# Altium PCB tmp235_Front_End_Siognal_Chain.PcbDoc
Units mil, origin at the board's own origin, x right, y up, seen from the top; angles counter-clockwise.
Board outline 2560 x 1190 mil, 5 copper layers (Top Layer, GND, 3V3, 5V, Bottom Layer), stack 24.902 mil thick; 26 components, 27 nets, 116 pads, 66 vias.
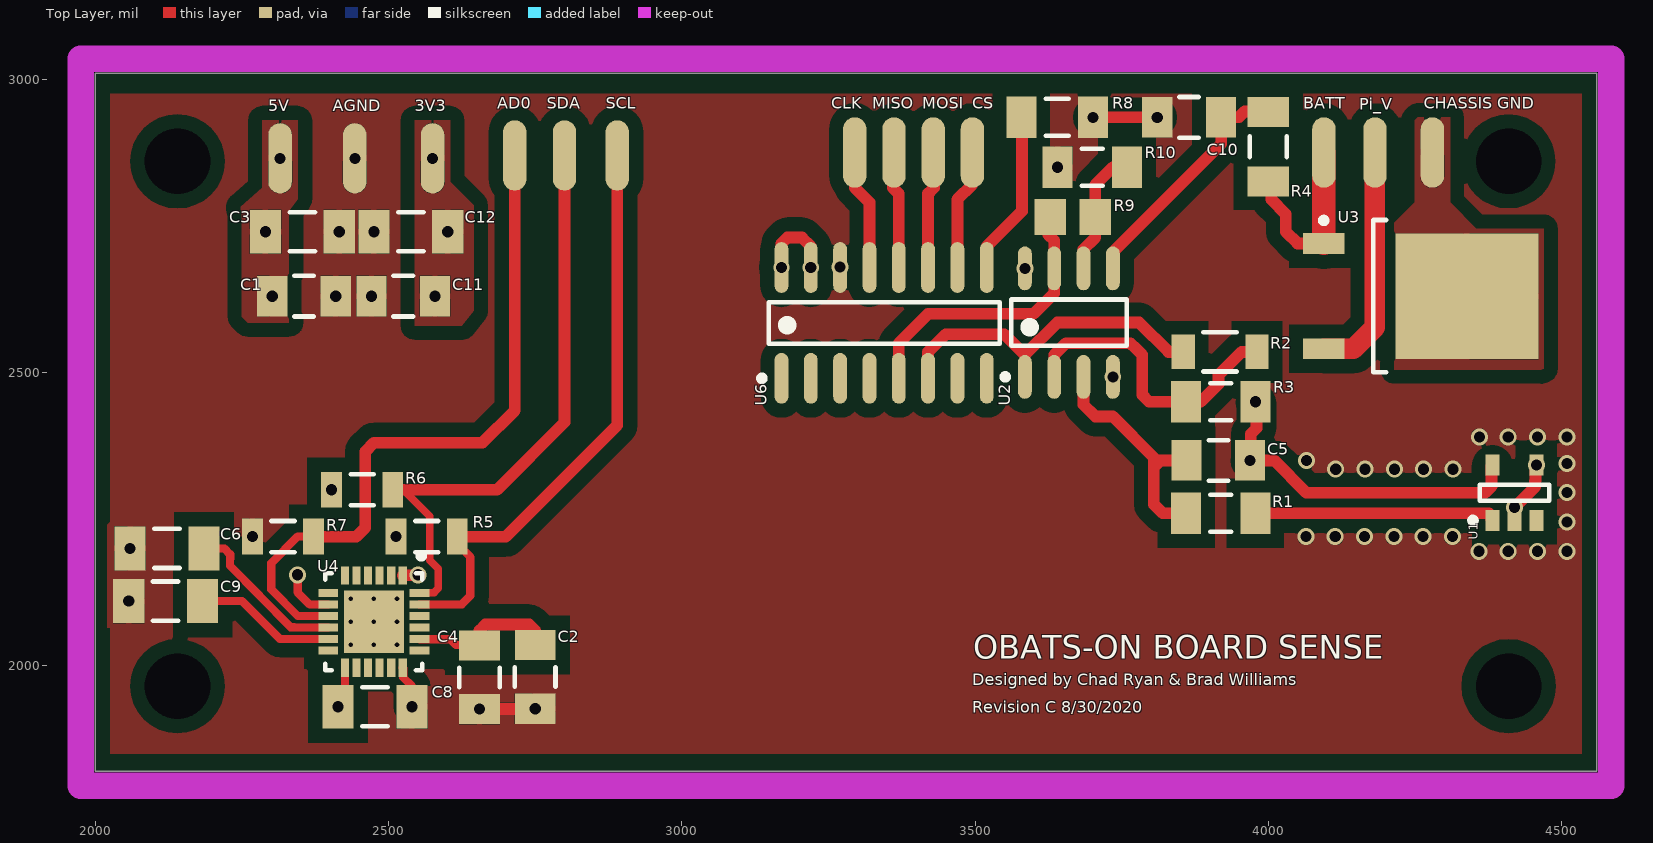
[diagram p0: Top Layer view]
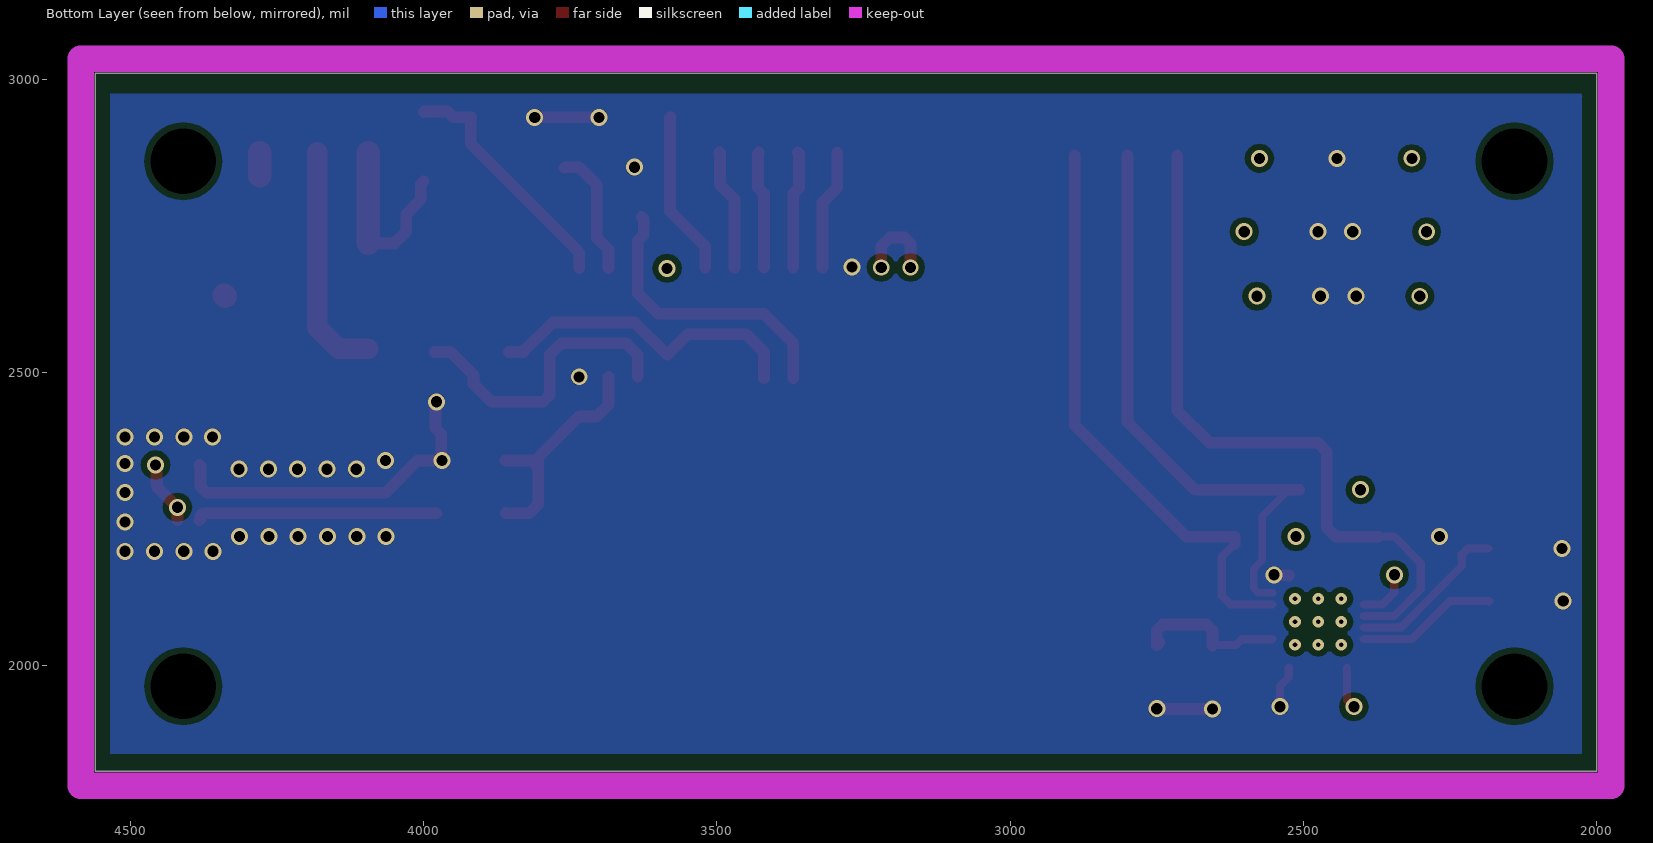
[diagram p1: Bottom Layer view, seen from below]
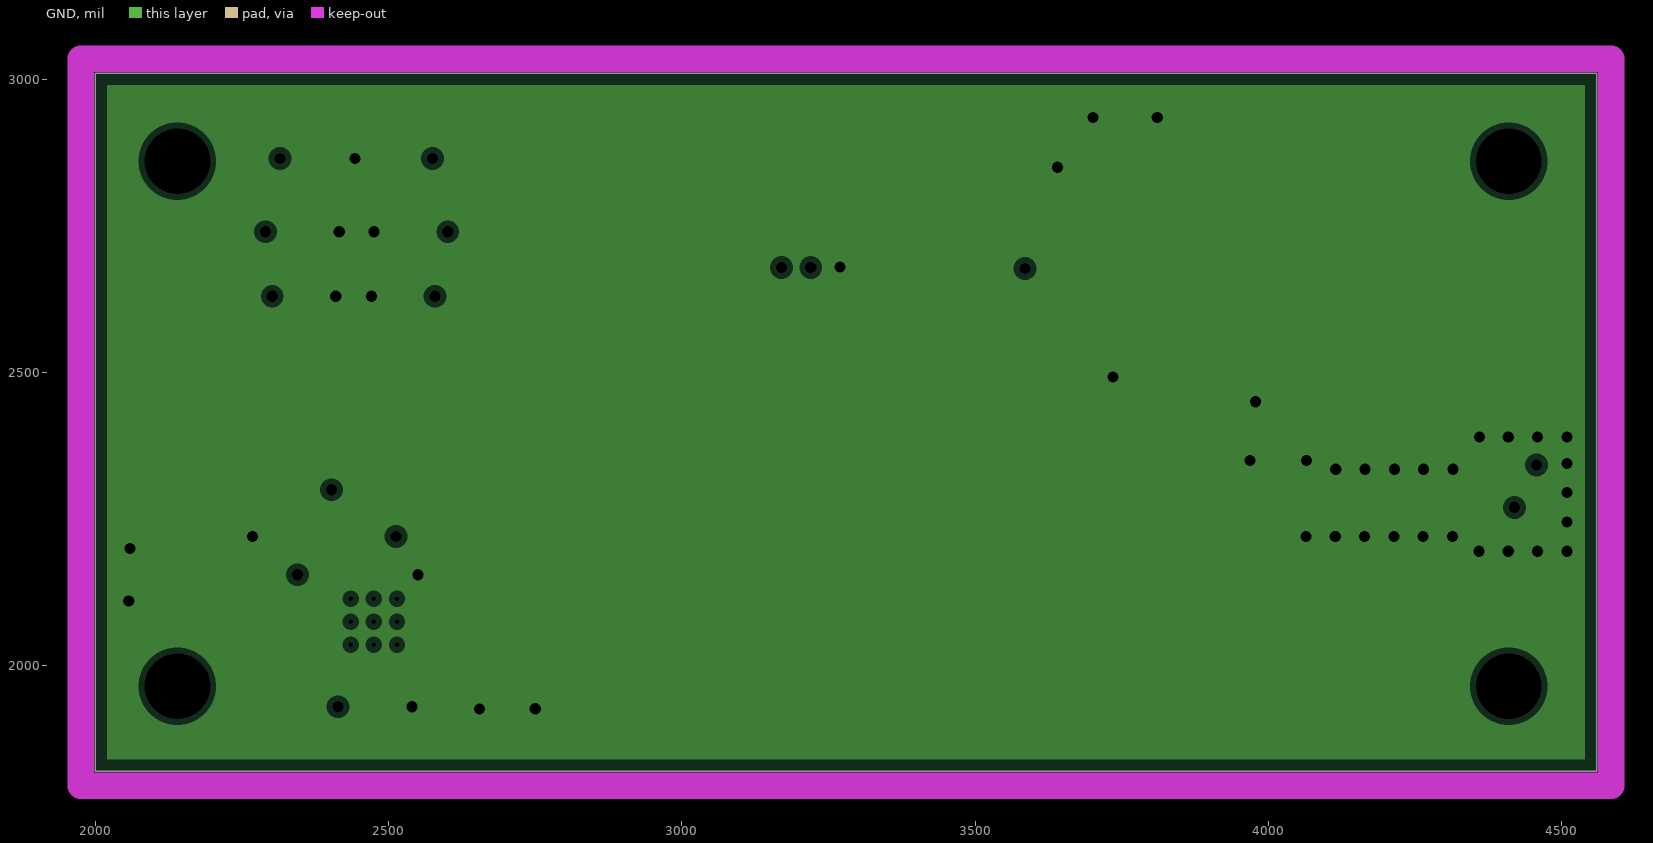
[diagram p2: GND, clearances drawn from the general rule]
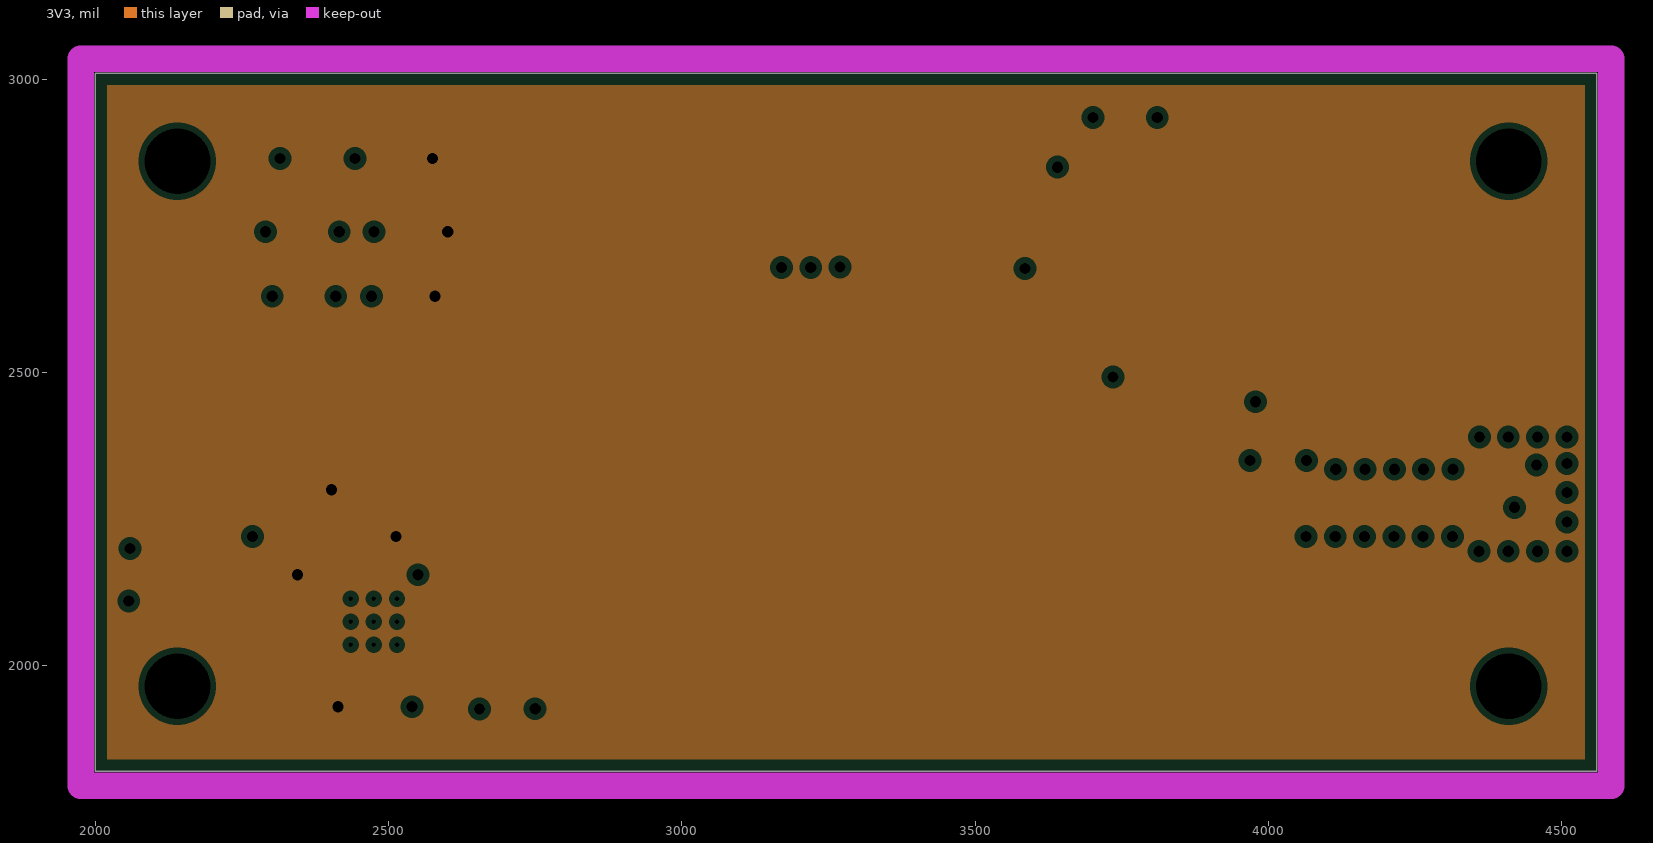
[diagram p3: 3V3, clearances drawn from the general rule]
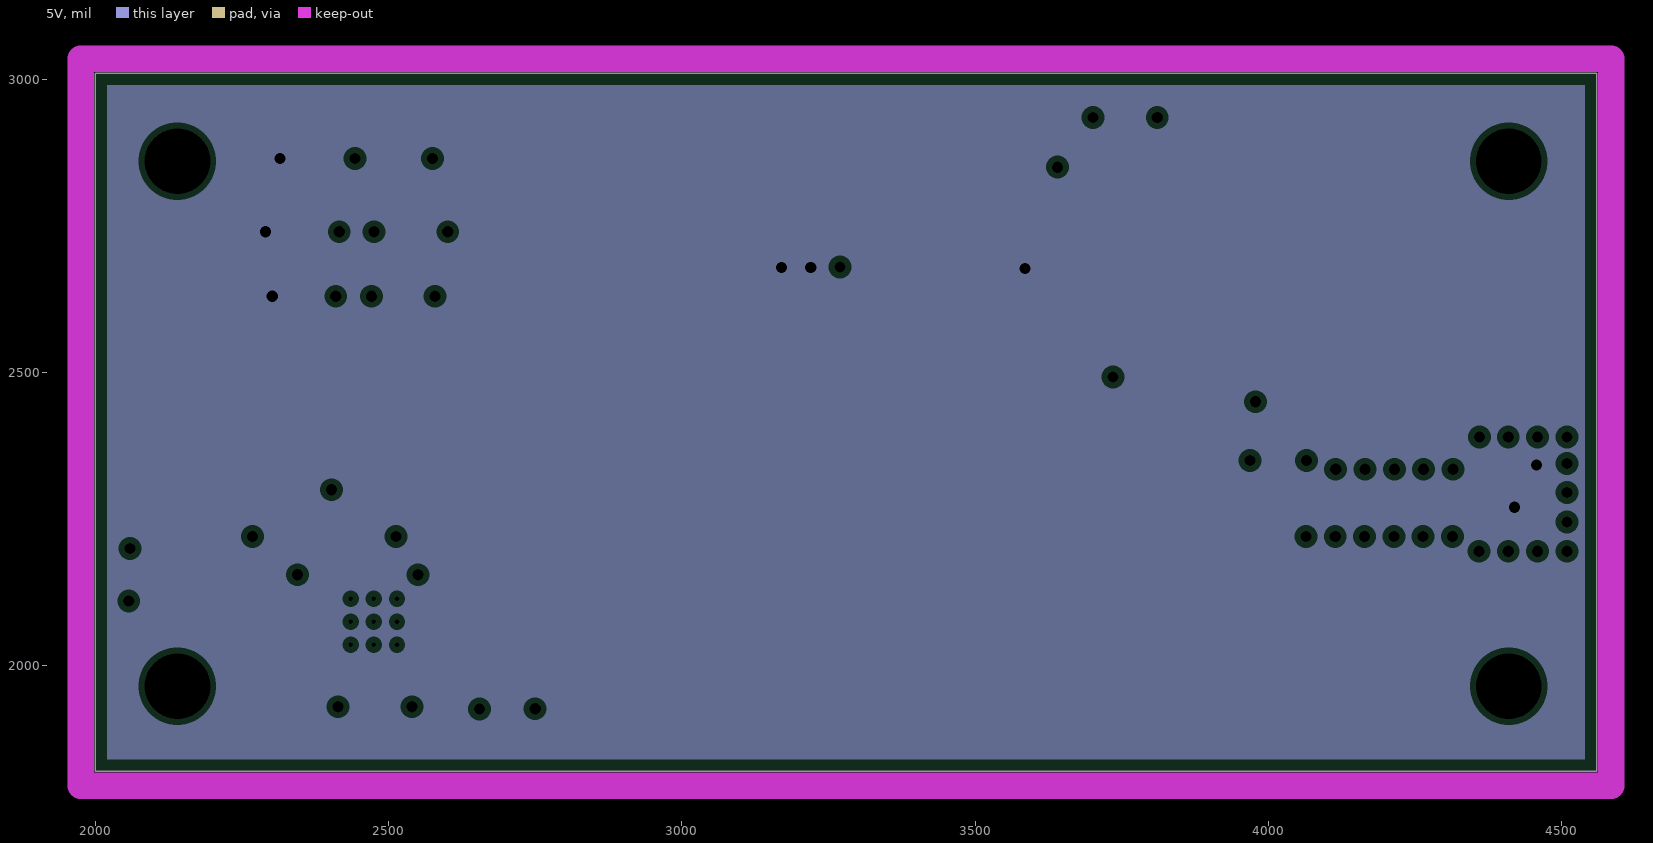
[diagram p4: 5V, clearances drawn from the general rule]

## Layer stack, top to bottom
Top Solder: solder mask 0.4, Solder Resist, Dk 3.5
Top Layer: signal copper 2.756
Dielectric 2: prepreg 2.8, PP-006, Dk 4.1
GND: plane copper 1.378, net AGND
Dielectric 1: dielectric 4.1, FR-4, Dk 4.8
3V3: plane copper 2.7559, net +3.3V_P
Dielectric 4: prepreg 2.8, PP-006, Dk 4.1
5V: plane copper 2.7559, net +5V_P
Dielectric 3: prepreg 2.8, PP-006, Dk 4.1
Bottom Layer: signal copper 2.756
Bottom Solder: solder mask 0.4, Solder Resist, Dk 3.5

## Board outline
2000,3010 2000,1820 4560,1820 4560,3010

## Design rules (kind name [scope] priority, off if disabled: settings)
Clearance Clearance_5 [InNamedPolygon('AGND_L05_P067')] p1: gap=10 ignorepadtopadclearanceinfootprint=FALSE except(0: Arc-Hole Track-Hole SMDPad-Hole THPad-Hole Via-Hole Fill-Hole Poly-Hole Region-Hole Text-Hole)
Clearance Clearance_4 [InNamedPolygon('AGND_L01_P065')] p2: gap=24 ignorepadtopadclearanceinfootprint=FALSE
Clearance Clearance_3 [InNamedPolygon('AGND_L01_P065')] p3: gap=30 ignorepadtopadclearanceinfootprint=FALSE
Clearance Clearance_2 [InNamedPolygon('AGND_L01_P065')] p4: gap=10 ignorepadtopadclearanceinfootprint=FALSE except(0: Arc-Hole Track-Hole SMDPad-Hole THPad-Hole Via-Hole Fill-Hole Poly-Hole Region-Hole Text-Hole)
Clearance Clearance_1 [InNamedPolygon('AGND_L01_P065')] p5: gap=10 ignorepadtopadclearanceinfootprint=FALSE except(0: Arc-Hole Track-Hole SMDPad-Hole THPad-Hole Via-Hole Fill-Hole Poly-Hole Region-Hole Text-Hole)
Clearance [All] p6 off: gap=10 ignorepadtopadclearanceinfootprint=FALSE except(0: Arc-Hole Track-Hole SMDPad-Hole THPad-Hole Via-Hole Fill-Hole Poly-Hole Region-Hole Text-Hole)
ComponentClearance [All] p1 off: gap=10 collisioncheckmode=3 verticalgap=10 showdistances=FALSE
Height [All] p1 off: minheight=0 maxheight=1000 prefheight=500
HoleSize [All] p1: absolutevalues=TRUE maxlimit=500 minlimit=1 maxpercent=80.000 minpercent=20.000
PlaneClearance [All] p1: clearance=10
PlaneConnect [All] p1: planeconnectstyle=Relief reliefexpansion=20 reliefentries=4 reliefconductorwidth=10 reliefairgap=10
PolygonConnect [All] p1 off: connectstyle=Relief reliefconductorwidth=10 reliefentries=4 polygonreliefangle="90 Angle" airgapwidth=10
RoomDefinition "Gyro Accel Temp MPU6050" [InComponentClass('Gyro Accel Temp MPU6050')] p1 off: confinementstyle=ConfineIn formatcopy=TRUE lockcomponents=FALSE outline 1935,1780 1990,1780 1990,1805 1935,1805
RoomDefinition ADC_MCP3008 [InComponentClass('ADC_MCP3008')] p2: confinementstyle=ConfineIn formatcopy=TRUE lockcomponents=FALSE outline 3126.69,2360 3150,2360 3150,2265 3126.69,2265
RoomDefinition Analog_Telem [InComponentClass('Analog_Telem')] p3 off: confinementstyle=ConfineIn formatcopy=TRUE lockcomponents=FALSE outline 1935,1765 4625,1765 4625,3075 1935,3075
RoutingVias [All] p1: holewidth=19 width=29 viastyle="Through Hole" minholewidth=10 minwidth=20 maxholewidth=35 maxwidth=50
SilkToSolderMaskClearance [IsPad] p1: minsilkscreentomaskgap=8 clearancetoexposedcopper=TRUE
SolderMaskExpansion [All] p1: expansion=4 istentingtop=FALSE
Width [All] p1 off: maxlimit=10 minlimit=10 preferedwidth=10
24 further rules are at their usual default settings.

## Classes and differential pairs
component class ADC_MCP3008: R8 U6
component class "Gyro Accel Temp MPU6050": C2 C4 C6 C8 C9 C11 C12 R5 R6 R7 U4
component class Analog_Telem: C1 C3 C5 C10 R1 R2 R3 R4 R9 R10 U1 U2 U3

## Components (designator, comment, footprint, x,y, rotation, side; value= is the part's Value field where it differs from the comment)
C1 "1u" FP-CL31-IPC_B 2355.81,2630 r0 top
C2 "1u" FP-CL31-IPC_B 2750,1980.81 r270 top
C3 "0.1u" CAPC1206(3216)130_M 2352.99,2740 r180 top value=100nF
C4 "1u" FP-CL31-IPC_B 2655,1980 r270 top
C5 "1u" FP-CL31-IPC_B 3915,2350 r0 top
C6 "0.1u" CAPC1206(3216)130_M 2122.01,2200 r0 top value=100nF
C8 "0.1u" CAPC1206(3216)130_M 2477.01,1930 r180 top value=100nF
C9 "0.1u" CAPC1206(3216)130_M 2120,2110 r0 top value=100nF
C10 "1u" FP-CL31-IPC_B 3865,2935 r180 top
C11 "1u" FP-CL31-IPC_B 2525,2630 r180 top
C12 "0.1u" CAPC1206(3216)130_M 2537.99,2740 r0 top value=100nF
R1 "10K" RESC3116X65X45ML10T20 3919.06,2260 r180 top
R2 "6.8K" FP-AC1206-MFG 3917.99,2535 r180 top value=6.8KΩ
R3 "10K" RESC3116X65X45ML10T20 3919.06,2450 r180 top
R4 "10K" RESC3116X65X45ML10T20 4000,2885 r90 top
R5 "4.7K" RESC3216X70X50LL05T20 2565,2220 r0 top
R6 "4.7K" RESC3216X70X50LL05T20 2455,2300 r0 top
R7 "4.7K" RESC3216X70X50LL05T20 2320,2220 r0 top
R8 "10" RESC3216X60X45ML10T20 3640,2935 r180 top
R9 "24K" RESC2013X70X40ML20T20 3666.61,2765 r180 top
R10 "10K" RESC3116X65X45ML10T20 3700,2850 r0 top
U1 "TMP36GRTZ-REEL7" ADI-RJ-5_L 4420,2295 r90 top
U2 "OP284ESZ" ADI-R-8_L 3660,2585 r90 top
U3 "L4941BDT-TR" TO-252_L 4260,2630 r0 top
U4 "MPU6050" INSE-QFN-24_V 2475,2075 r270 top
U6 "MCP3008T-I/SL" SOIC-SL16_N 3345,2584.49 r90 top

## Footprints (in the part's own frame and the unit in brackets; to place one, negate y for a bottom-side part, rotate by r counter-clockwise, add the part's x,y. Pads: shape width x height; smd on the part's side, far side on the other; paste and mask are expansions set on the pad)
ADI-R-8_L [mm] "SOIC, 8-Leads, Body 4.9x3.9mm, Pitch 1.27mm, IPC High Density"
  oval 1.9x0.6 smd: 1(-2.35,1.905) 2(-2.35,0.635) 3(-2.35,-0.635) 4(-2.35,-1.905) 5(2.35,-1.905) 6(2.35,-0.635) 7(2.35,0.635) 8(2.35,1.905)
  silkscreen extent -2.47,-2.5 1,2.88, body extent -2,-2.5 2,2.5, height 1.75
ADI-RJ-5_L [mm] "SOT-23, 5-Leads, Body 2.9x1.6mm, Pitch 0.95mm, IPC High Density"
  rect 0.9x0.6 smd: 1(-1.2,0.95) 2(-1.2,0) 3(-1.2,-0.95) 4(1.2,-0.95) 5(1.2,0.95)
  silkscreen extent -1.32,-1.5 0.35,1.92, body extent -0.85,-1.5 0.85,1.5, height 1.45
CAPC1206(3216)130_M [mm] "Chip Capacitor, Body 3.2x1.6mm, Height 1.3mm, IPC Low Density"
  rect 1.35x1.9 smd: 1(-1.6,0) 2(1.6,0)
  silkscreen extent -0.55,-0.85 0.55,0.85, body extent -1.7,-0.9 1.7,0.9, height 1.3
FP-AC1206-MFG [mm]
  rect 1x1.5 smd paste+0 mask+0: 1(-1.6,0) 2(1.6,0)
  silkscreen extent -0.72,-0.85 0.72,0.85, body extent -2.2,-0.95 2.2,0.95, height 0.25
FP-CL31-IPC_B [mil]
  rect 51.4x69.22 smd paste+0 mask+0: 1(-54.19,0) 2(54.19,0)
  silkscreen extent -17,-35 17,35, body extent -90,-44 90,44, height 10
INSE-QFN-24_V [mm] "QFN, 24-Leads, Body 4.00x4.00mm, Pitch 0.50mm, Thermal Pad 2.7x2.6mm"
  rect 0.8x0.35 smd: 1(-2,1.25) 2(-2,0.75) 3(-2,0.25) 4(-2,-0.25) 5(-2,-0.75) 6(-2,-1.25) 13(2,-1.25) 14(2,-0.75) 15(2,-0.25) 16(2,0.25) 17(2,0.75) 18(2,1.25)
  rect 0.35x0.85 smd: 7(-1.25,-1.975) 8(-0.75,-1.975) 9(-0.25,-1.975) 10(0.25,-1.975) 11(0.75,-1.975) 12(1.25,-1.975) 19(1.25,1.975) 20(0.75,1.975) 21(0.25,1.975) 22(-0.25,1.975) 23(-0.75,1.975) 24(-1.25,1.975)
  rect 2.7x2.6 smd: 25(0,0)
  silkscreen extent -2.97,-2.1 2.1,2.17, body extent -2,-2 2,2, height 0.95
RESC2013X70X40ML20T20 [mm] "Chip Resistor, 2-Leads, Body 2.00x1.25mm, IPC Low Density"
  rect 1.35x1.55 smd: 1(-0.975,0) 2(0.975,0)
  body extent -1.1,-0.72 1.1,0.72, height 0.7
RESC3116X65X45ML10T20 [mm] "Chip Resistor, 2-Leads, Body 3.10x1.60mm, IPC Low Density"
  rect 1.3x1.8 smd: 1(-1.5,0) 2(1.5,0)
  silkscreen extent -0.45,-0.8 0.45,0.8, body extent -1.6,-0.85 1.6,0.85, height 0.65
RESC3216X60X45ML10T20 [mm] "Chip Resistor, 2-Leads, Body 3.20x1.60mm, IPC Low Density"
  rect 1.3x1.8 smd: 1(-1.55,0) 2(1.55,0)
  silkscreen extent -0.5,-0.8 0.5,0.8, body extent -1.65,-0.85 1.65,0.85, height 0.6
RESC3216X70X50LL05T20 [mm] "Chip Resistor, 2-Leads, Body 3.20x1.60mm, IPC High Density"
  rect 0.9x1.55 smd: 1(-1.325,0) 2(1.325,0)
  silkscreen extent -0.5,-0.67 0.5,0.67, body extent -1.63,-0.82 1.62,0.82, height 0.7
SOIC-SL16_N [mm] "SOIC, 16-Leads, Body 9.9x3.9mm, Pitch 1.27mm, IPC Medium Density"
  oval 2.2x0.6 smd: 1(-2.4,4.445) 2(-2.4,3.175) 3(-2.4,1.905) 4(-2.4,0.635) 5(-2.4,-0.635) 6(-2.4,-1.905) 7(-2.4,-3.175) 8(-2.4,-4.445) 9(2.4,-4.445) 10(2.4,-3.175) 11(2.4,-1.905) 12(2.4,-0.635) 13(2.4,0.635) 14(2.4,1.905) 15(2.4,3.175) 16(2.4,4.445)
  silkscreen extent -2.52,-5 0.9,5.42, body extent -2,-5 2,5, height 1.75
TO-252_L [mm] "D-PAK, 4-Leads, Body 6.1x6.5mm, Pitch 2.28mm, Lead Span 9.7mm, IPC High Density"
  rect 1.8x0.9 smd: 1(-4.2,2.28) 3(-4.2,-2.28)
  rect 6.2x5.45 smd: 4(2,0)
  silkscreen extent -4.32,-3.3 -1.5,3.4, body extent -2.05,-3.3 4.15,3.3, height 2.4

## Part data
C1 C2 C4 C5 C10 C11: library part CMP-13271-001662-1, "Cap Ceramic 1uF 50V X7R ±10% SMD 1206 +125°C Embossed T/R", Capacitance=1uF, Case Code (Imperial)=1206, Case Code (Metric)=3216, Dielectric=X7R, Max Operating Temperature=125°C, Min Operating Temperature=-55°C, Package Quantity=1, Tolerance=10%, Voltage=50V, Case/Package=1206, Contact Plating=Tin, Depth=1.6mm, Height=1.6mm, Lead Free="Lead Free", Length=3.2mm, Material=Ceramic, Mount="Surface Mount", Packaging="Tape and Reel", Radiation Hardening=No, Thickness=0.071inch, Voltage Rating=50V, Voltage Rating (DC)=50V, Width=0.063inch
C3 C6 C8 C9 C12: library part CMP-1037-04215-1, "CAP 100nF 100V ±20% 1206 (3216 Metric) Thickness 1.3mm SMD", Case-EIA=1206, Case-Metric=3216, Rated Voltage="100 V", Tolerance=Â±20%, Max Thickness="1.3 mm", Technology=SMT
R1 R3 R4 R10: library part CMP-2003-04910-1, Manufacturer=Yageo, Part Number=AC1206FR-0710KL
R2: library part CMP-03412-003637-1, "RES SMD 6.8K OHM 1% 1/4W 1206", Manufacturer=Yageo, Manufacturer Part Number=AC1206FR-076K8L, Package=AC1206, Power Rating=0.25W, Resistance=6.8KΩ, Temperature="-55°C to +155°C", Temperature Range High=+155°C, Temperature Range Low=-55°C, Tolerance=0.01, Voltage Rating=200V, Automotive=Yes, Automotive Grade="Grade 0", Category=Res, ComponentLink2Description=Datasheet, ComponentLink2URL=http://www.yageo.com/NewPortal/yageodocoutput?fileName=/pdf/R-Chip/PYu-AC_51_RoHS_L_6.pdf, Composition="Thick Film", Device Class L1="Passive Components", Device Class L2=Resistors, Device Class L3="Chip SMD Resistors", Digikey Description="RES SMD 6.8K OHM 1% 1/4W 1206", Footprint Url=http://www.yageo.com/exep/pages/download/literatures/PYu-R_Mount_10.pdf, Height=0.65mm, Ipc Land Pattern Name=RESC310160X55, Lead Free=Yes, Mouser Description="Thick Film Resistors - SMD 1/4W 6.8K ohm 1% AEC-Q200", Octopart=https://octopart.com/ac1206fr-076k8l-yageo-26041203, RoHS=TRUE, Series=AC
R5 R6 R7: library part CMP-2003-00848-1, Manufacturer=Panasonic, Part Number=ERJ8ENF4701V
R8: library part CMP-2003-04815-1, Manufacturer="Vishay Dale", Part Number=CRCW120610R0FKEA
R9: library part CMP-2001-00525-1, Manufacturer=Panasonic, Part Number=ERJ6ENF2402V
U1: library part CMP-0887-00047-1, "Voltage Output Temperature Sensor, 2.7 to 5.5 V Supply, Industrial, 5-pin SOT23 (RJ-5), Reel", Manufacturer="Analog Devices", Supply Voltage Range="2.7 to 5.5 V", Code_JEDEC=MO-178-AA, ComponentLink1Description="Manufacturer URL", ComponentLink1URL=http://www.analog.com/en/index.html, ComponentLink2Description=Datasheet, ComponentLink2URL=http://www.analog.com/static/imported-files/data_sheets/TMP35_36_37.pdf, ComponentLink3Description="Package Specification", ComponentLink3URL=http://www.analog.com/static/imported-files/packages/PKG_PDF/SOT-23(RJ)/RJ_5.pdf, ComponentLink4Description="Product URL", ComponentLink4URL=http://www.analog.com/en/mems-sensors/digital-temperature-sensors/tmp36/products/product.html, DatasheetVersion="Rev. F", Mounting Technology="Surface Mount", PackageDescription="5-Pin Small Outline Transistor Package, Body 2.9 x 1.6 mm, Pitch 0.95 mm", PackageReference=RJ-5, PackageVersion="121608-A , 12/2008", Packing=Reel, PartNumber=TMP36GRTZ-REEL7
U2: library part CMP-0384-00701-1, "Double Channel Single-Supply Operation Operational Amplifier, 4.25 MHz BW, 4 V/us SR, Industrial, 8-pin SOIC (R-8), Tube", Amplifiers Per Package=2, Generic Part Number=OP284, Input Bias Current=80nA, Input Offset Voltage=175uV, Manufacturer="Analog Devices", Code_JEDEC=MS-012-AA, ComponentLink1Description="Manufacturer URL", ComponentLink1URL=http://www.analog.com/en/index.html, ComponentLink2Description=Datasheet, ComponentLink2URL=http://www.analog.com/static/imported-files/data_sheets/OP184_284_484.pdf, ComponentLink3Description="Package Specification", ComponentLink3URL=http://www.analog.com/static/imported-files/packages/PKG_PDF/SOIC_Narrow%20(R)/R_8.pdf, DatasheetVersion="Rev. J", Iq/Amp=2mA, Mounting Technology="Surface Mount", PackageDescription="8-Pin Standard Small Outline Package, Body 3.9 x 4.9 mm, Pitch 1.27 mm", PackageReference=R-8, PackageVersion=060506-A, PartNumber=OP284ESZ, Slew Rate=4V/us, Small Signal Bandwidth=4.25MHz, V Span Max=36V, V Span Min=3V
U3: library part CMP-0244-00200-1, "1A Very Low Drop Regulator, 3-Pin DPAK, Tape and Reel", ComponentLink1Description="Manufacturer URL", ComponentLink1URL=http://www.st.com, ComponentLink2Description=Datasheet, ComponentLink2URL=http://www.st.com/internet/com/TECHNICAL_RESOURCES/TECHNICAL_LITERATURE/DATASHEET/CD00000443.pdf, DatasheetVersion=15/09/2006, PackageDescription="3-Pin Transistor Outline Package 2.28 mm Pitch, 9.7 mm Lead Span (DPAK)", PackageReference=TO-252, PackageVersion=2011
U4: library part CMP-1753-00002-1, "3-Axis Gyroscope, 3-Axis Accelerometer / , 2.375 to 3.46 V, -40 to 105 degC, 24-Pin QFN, RoHS, Tape and Reel", Case Code (Imperial)=0603, Case Code (Metric)=1608, Max Operating Temperature=155degC, Min Operating Temperature=-55degC, Package Quantity=5000, Power Rating="100 mW", Resistance="5.6 kohm", Tolerance=1%, Voltage Rating="75 V", Case/Package=0603, ComponentLink1Description="Manufacturer URL", ComponentLink1URL=http://www.invensense.com/, ComponentLink2Description=Datasheet, ComponentLink2URL=https://datasheet.ciiva.com/1513/1788002-1513632.pdf, DatasheetVersion="Rev. 3.4, 08/2013", Height="0.45 mm", Length="1.6 mm", Mount="Surface Mount", PackageDescription="24-Pin Quad Flat No-lead Package, Body 4 x 4 mm, Pitch 0.5 mm", PackageReference=QFN-24, Packaging="Tape and Reel", Pins=2, Radiation Hardening=No, REACH SVHC=Yes, RoHSCompliant=True, Width="0.8 mm"
U6: library part CMP-0188-00351-2, "2.7V 4-Channel/8-Channel 10-Bit A/D Converters with SPI Serial Interface, 16-Pin SOIC 150mil, Industrial Temperature, Tape and Reel", Code_IPC=SOIC127P600-16, Code_JEDEC=MS-012-AC, ComponentLink1Description="Manufacturer URL", ComponentLink1URL=http://www.microchip.com/, ComponentLink2Description=Datasheet, ComponentLink2URL=http://ww1.microchip.com/downloads/en/DeviceDoc/21295d.pdf, ComponentLink3Description="Package Specification", ComponentLink3URL=http://www.microchip.com/stellent/groups/techpub_sg/documents/packagingspec/en012702.pdf, DatasheetVersion="revD, Dec-2008", PackageDescription="16-Lead Plastic Small Outline (SL) - Narrow, 3.90mm Body [SOIC]", PackageReference=SOIC-SL16, PackageVersion="revBB, Aug-2009", RevisionNote="URLs added."

## Free pads (board coordinates)
  round 60 hole 112 unplated: 1(2140,2860) 1(4410,1965) 1(4410,2860) 2(2140,1965)
  oval 40x120 smd: 4(2315,2865) 4(2442.5,2865) 4(2575,2865) 4(2715,2870) 4(2800,2870) 4(2890,2870) 4(3295,2875) 4(3361.86,2875) 4(3428.71,2875) 4(3495.57,2875) 4(4095,2875) 4(4182.01,2875.05) 4(4280,2875)

## Via types
v1: diameter 29, hole 19, Top Layer to Bottom Layer, 51 vias
v2: diameter 19.68, hole 7.87, Top Layer to Bottom Layer, 9 vias
v3: diameter 28, hole 19, Top Layer to Bottom Layer, 6 vias

## Nets (pads, with @x,y where several pads share a name; then routed paths per layer and width w, separated by ;. In a path a pad name is that pad's centre, name@x,y a point inside that pad or via, vN(x,y) a via of type N, cw(c..) or ccw(c..) an arc to the next point about the centre after c; other vN are vias at no path point)
12V_BATT: pad.4@4095,2875 R4.1 U3.1 | length 326.8
  Top Layer w20: R4.1 4005,2820.94 4005,2795 4030,2770 4030,2740 4050,2720 4094.41,2720 U3.1 U3.1@4095,2720.12
  Top Layer w40: U3.1@4095,2720.12 pad.4@4095,2875
+3.3V_P: C8.2 C11.1 C12.2 pad.4@2575,2865 R5.1 R6.1 U4.8 U4.13 | length 161.9
  Top Layer w14: v1(2345,2155) 2345,2125 2365.47,2104.53 U4.8 ; v1(2414.02,1930) 2425.68,1941.66 2425.68,1996.15 U4.13
  other v1: 2512.83,2220 2402.83,2300 2579.19,2630 2600.98,2740 2575,2865
+5V_P: C1.1 C3.2 pad.4@2315,2865 U1.2 U1.4 U2.8 U6.15 U6.16 | length 247.4
  Top Layer w20: v3(3170,2678.98) 3170,2720 3180,2730 3205,2730 3220,2715 v3(3220,2678.98) ; U1.2 v1(4420,2270) 4455,2305 4455,2315 4455.59,2315.59 4455.59,2340.43 v1(4457.4,2342.24)
  other v1: 3585,2677.52
  other v3: 2301.63,2630 2290,2740 2315,2865
AGND: C1.2 C2.2 C3.1 C4.2 C5.2 C6.1 C8.1 C9.1 C10.2 C11.2 C12.1 pad.4@2442.5,2865 R3.1 R7.1 R8.1 R10.1 U1.5 U2.4 U4.1 U4.18 U6.14 | length 885.6
  Top Layer w14: U4.18 2525,1995.47 2525,1980 2540,1965 v1(2540,1930)
  Top Layer w20: U4.1 2524.84,2154.37 2549.37,2154.37 v1(2550,2155) ; v1(2655,1925.81) 2655.41,1926.22 2749.59,1926.22 v1(2750,1926.63) ; v1(3701.02,2935) v1(3810.81,2935) ; v1(3978.11,2450) 3980,2448.11 3980,2405 3970,2395 3970,2350.81 v1(3969.19,2350) 4010,2350 4065,2295 4370,2295 4380.79,2305.79 4380.79,2340.43 U1.5
  other v1: 2057.01,2110 4359.19,2195 4409.19,2195 4459.19,2195 4509.19,2195 2059.02,2200 2267.83,2220 4064.19,2220 4114.19,2220 4164.19,2220 4214.19,2220 4264.19,2220 4314.19,2220 4509.19,2245 4509.19,2295 4115,2335 4165,2335 4215,2335 4265,2335 4315,2335 4509.19,2345 4065,2350 4360,2390 4409.19,2390 4459.19,2390 4509.19,2390 2410,2630 2470.81,2630 3270,2679.49 2415.98,2740 2475,2740 3640.94,2850 2442.5,2865
  other v3: 3735,2492.48
DGND: R8.2 U6.9 | length 281.3
  Top Layer w20: U6.9 3520,2715 3580,2775 3580,2933.98 R8.2
GND: pad.4@4280,2875 U3.4 | length 41.8
  Top Layer w40: pad.4@4280,2835 pad.4@4280,2875 ; U3.4 U3.4@4340,2631.26
NetC2_1: C2.1 C4.1 U4.20 | length 268.1
  Top Layer w14: U4.20 2553.23,2045 2605,2045 2615,2035 C4.1@2654.19,2035
  Top Layer w20: C4.1@2654.19,2035 C4.1 2655,2060 2665,2070 2740,2070 2750,2060 C2.1 C2.1@2745,2040
NetC5_1: C5.1 R1.2 U2.3 | length 407.2
  Top Layer w20: U2.3 3685,2445 3705,2425 3735,2425 3805,2355 3805,2338.28 ; R1.2@3860.41,2260.41 R1.2 3820,2260 3805,2275 3805,2338.28 ; C5.1 3816.72,2350 3805,2338.28
NetC6_2: C6.2 U4.10 | length 279.9
  Top Layer w14: C6.2 2220.27,2199.73 2229.96,2189.89 2229.81,2170.35 2332.91,2065.65 2338.71,2065.61 U4.10
NetC9_2: C9.2 U4.11 | length 241
  Top Layer w14: C9.2 2249.9,2110.07 2249.97,2110.07 2314.57,2045.47 U4.11
NetC10_1: C10.1 R4.2 U2.5 | length 419.8
  Top Layer w20: U2.5 3735,2704.09 3736.81,2705.9 3736.81,2706.81 3765,2735 3876.98,2846.98 3920,2890 3920,2934.19 C10.1 3950,2935 3960,2945 3999.06,2945 R4.2
NetR1_1: R1.1 U1.1 | length 413
  Top Layer w20: R1.1 4376.26,2260 4380.79,2255.47 4380.79,2249.57 U1.1
NetR2_1: R2.1 R3.2 U2.2 | length 517.2
  Top Layer w20: U2.2 3635,2530 3655,2550 3765,2550 3774.97,2540.03 3785,2530 3785,2461.72 3796.72,2450 R3.2 3885,2450 3915,2480 3915,2495 3955,2535 R2.1
NetR2_2: R2.2 U2.1 U6.6 | length 549.9
  Top Layer w20: U6.6@3420,2490.51 3420,2535 3450,2565 3550,2565 3585,2530 3640,2585 3780,2585 3830,2535 R2.2
NetR5_2: pad.4@2890,2870 R5.2 U4.23 | length 1013.9
  Top Layer w14: U4.23 2625,2104.53 ; R5.2@2617.17,2207.2 2639.37,2185 2639.37,2119.37 2625,2105
  Top Layer w20: R5.2@2617.17,2207.2 R5.2 2700,2220 2890,2410 pad.4@2890,2870
NetR6_2: pad.4@2800,2870 R6.2 U4.24 | length 1023.7
  Top Layer w13: 2525,2300 2570,2255 2570,2180 2585,2165 2585,2132.22 2577.38,2124.6 2553.15,2124.6 U4.24
  Top Layer w20: R6.2 2525,2300 2685,2300 2800,2415 pad.4@2800,2870
NetR7_2: pad.4@2715,2870 R7.2 U4.9 | length 1194.8
  Top Layer w14: R7.2 2345,2220 2300,2175 2300,2130 2345.12,2084.88 2397.2,2084.88 U4.9
  Top Layer w20: R7.2 2445,2220 2460,2235 2460,2365 2475,2380 2660,2380 2715,2435 pad.4@2715,2870
NetR9_1: R9.1 R10.2 U2.6 | length 218.6
  Top Layer w20: U2.6 3685,2710 3705,2730 R9.1 3705,2820 3735,2850 R10.2 R10.2@3760,2849.06
NetR9_2: R9.2 U2.7 U6.5 | length 495.7
  Top Layer w20: U6.5 3370,2550 3420,2600 3600,2600 3635,2635 U2.7 3635,2725 3625,2735 3625,2761.77 R9.2
NetU3_3: pad.4@4182.01,2875.05 U3.3 | length 400.8
  Top Layer w20: U3.3 U3.3@4094.88,2540
  Top Layer w35: U3.3@4094.88,2540 4145,2540 4182.01,2577.01 pad.4@4182.01,2875.05
NetU4_12: U4.12
NetU6_5: 
NetU6_6: 
NetU6_10: pad.4@3495.57,2875 U6.10 | length 206.6
  Top Layer w20: U6.10 3470,2795 3495,2820 3495,2874.43 pad.4@3495.57,2875
NetU6_11: pad.4@3428.71,2875 U6.11 | length 201.7
  Top Layer w20: U6.11@3420.69,2679.67 U6.11 3420,2805 3430,2815 3430,2873.71 pad.4@3428.71,2875
NetU6_12: pad.4@3361.86,2875 U6.12 | length 200.9
  Top Layer w20: pad.4@3361.86,2875 3360,2873.14 3360,2815 3370,2805 U6.12
NetU6_13: pad.4@3295,2875 U6.13 | length 206.4
  Top Layer w20: pad.4@3295,2875 3295,2815 3320,2790 U6.13
pads on no net: U1.3 U4.2 U4.3 U4.4 U4.5 U4.6 U4.7 U4.14 U4.15 U4.16 U4.17 U4.19 U4.21 U4.22 U4.25 U6.1 U6.2 U6.3 U6.4 U6.7 U6.8
copper on no net:
  other v2: 2435.63,2035.63 2475,2035.63 2514.37,2035.63 2435.63,2075 2475,2075 2514.37,2075 2435.63,2114.37 2475,2114.37 2514.37,2114.37

## Polygon pours and split planes (outlines as drawn)
AGND on Top Layer "AGND_L01_P056" (solid, pour order 56): 2515,1965 2785,1965 2785,1895 2775,1885 2520,1885 2510,1895 2515,1900
AGND on Top Layer "AGND_L01_P058" (solid, pour order 58): 2090,2245 2090,2065 2020,2065 2020,2240 2025,2245
AGND on Top Layer "AGND_L01_P059" (solid, pour order 59): 2415,2930 2475,2930 2475,2825 2490,2805 2510,2785 2510,2580 2375,2580 2375,2780 2395,2800 2400,2805 2415,2825
+5V_P on Top Layer "+5V_P_L01_P061" (solid, pour order 61): 2345,2930 2345,2795 2330,2775 2330,2585 2260,2585 2250,2595 2250,2775 2245,2780 2285,2815 2285,2930
+3.3V_P on Top Layer "+3.3V_P_L01_P063" (solid, pour order 63): 2545,2930 2545,2580 2625,2580 2645,2605 2645,2610 2645,2785 2605,2825 2605,2930
GND on Top Layer "GND_L01_P064" (solid, pour order 64): 4255,2935 4250,2930 4250,2790 4215,2755 4215,2505 4465,2505 4470,2500 4470,2745 4355,2745 4310,2790 4310,2935
AGND on Top Layer "AGND_L01_P065" (solid, remove dead copper, pour order 65): 2025,2975 4535,2975 4535,1850 2025,1850
no net on Top Layer "NONET_L01_P029" (solid, pour order 29): 1920,2210
no net on Top Layer "NONET_L01_P030" (solid, pour order 30): 4497.5,2872.5
no net on Top Layer "NONET_L01_P038" (solid, pour order 38): 2290,2015
no net on Top Layer "NONET_L01_P039" (solid, pour order 39): 2435,2935
no net on Top Layer "NONET_L01_P043" (solid, pour order 43): 2375,2935
no net on Top Layer "NONET_L01_P049" (solid, pour order 49): 1710,2790
no net on Top Layer "NONET_L01_P052" (solid, pour order 52): 3840,3170
no net on Top Layer "NONET_L01_P053" (solid, pour order 53): 2785,1955
no net on Top Layer "NONET_L01_P057" (solid, pour order 57): 2550,1865
no net on Top Layer "NONET_L01_P062" (solid, pour order 62): 2495,2935
AGND on Bottom Layer "AGND_L05_P067" (solid, pour order 67): 2020,2975 4535,2975 4535,1850 2025,1850 2025,2970
no net on Bottom Layer "NONET_L05_P066" (solid, pour order 66): 2015,2980
AGND on GND (split plane): 4539.9,1840.1 2020.1,1840.1 2020.1,2989.9 4539.9,2989.9
+3.3V_P on 3V3 (split plane): 4539.9,1840.1 2020.1,1840.1 2020.1,2989.9 4539.9,2989.9
+5V_P on 5V (split plane): 4539.9,1840.1 2020.1,1840.1 2020.1,2989.9 4539.9,2989.9

## Keep-outs
Keep-Out Layer:
  lines w45: 1975,1795 4585,1795 4585,3035 1975,3035 1975,1795

## Silkscreen, mask and mechanical layers (free items; w line width, h text height)
Top Overlay:
  text "AD0" at 2685,2950 h20
  text "SDA" at 2770,2950 h20
  text "SCL" at 2870,2950 h20
  text "CLK" at 3255,2950 h20
  text "MISO" at 3325,2950 h20
  text "MOSI" at 3410,2950 h20
  text "CS" at 3495,2950 h20
  text "BATT" at 4060,2950 h20
  text "CHASSIS GND" at 4265,2950 h20
  text "Pi_V" at 4155,2948.33 h20
  text "5V" at 2295,2945 h20
  text "AGND" at 2405,2945 h20
  text "3V3" at 2545,2945 h20
  text "OBATS-ON BOARD SENSE" at 3497,2012 h40
  text "Designed by Chad Ryan & Brad Williams" at 3495,1966.66 h20
  text "Revision C 8/30/2020" at 3495,1920 h20